# Altium PCB PCB1.PcbDoc
Units mil, origin at the board's own origin, x right, y up, seen from the top; angles counter-clockwise.
Board outline 6000 x 4000 mil, 2 copper layers (Top Layer, Bottom Layer); 9 components, 23 nets, 266 pads, 0 vias.
Unrouted connection lines stored in the file: 25.
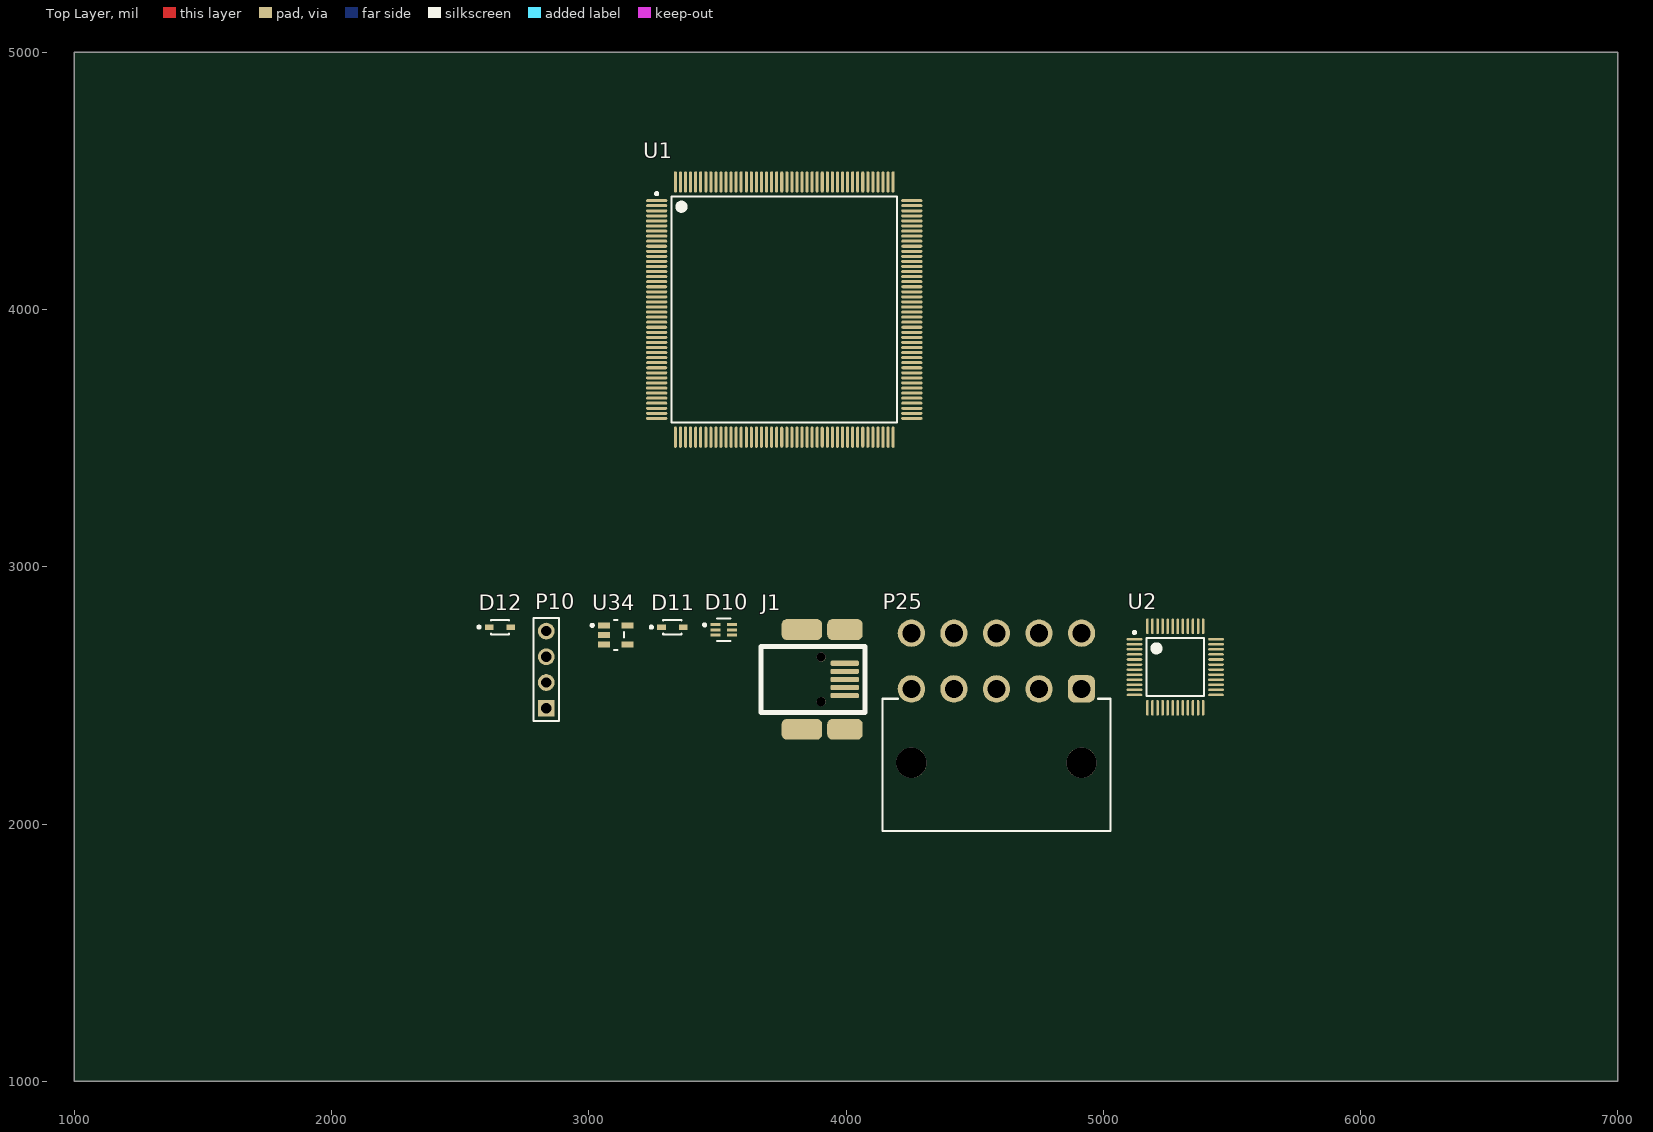
[diagram p0: Top Layer view]
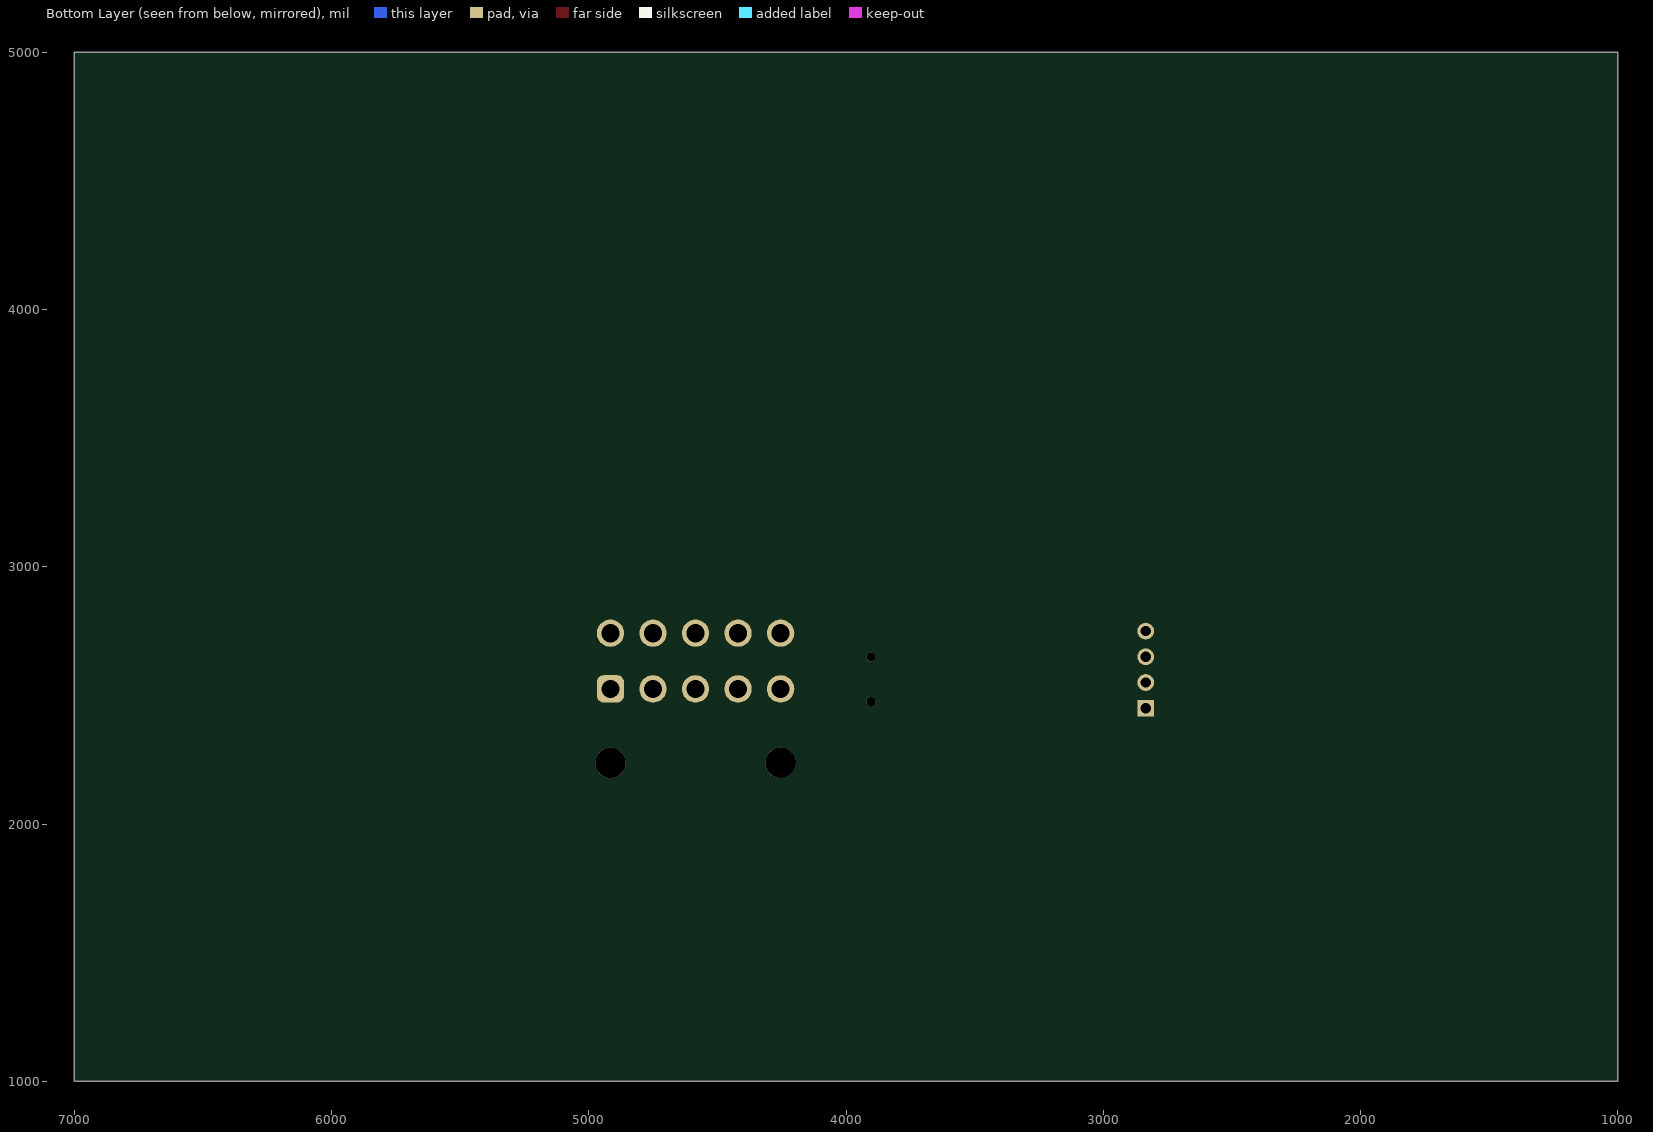
[diagram p1: Bottom Layer view, seen from below]

## Layer stack, top to bottom
Top Solder: solder mask 0.4, Solder Resist, Dk 3.5
Top Layer: signal copper 1.4
Dielectric 1: dielectric 12.6, FR-4, Dk 4.8
Bottom Layer: signal copper 1.4
Bottom Solder: solder mask 0.4, Solder Resist, Dk 3.5

## Board outline
1000,1000 7000,1000 7000,5000 1000,5000

## Design rules (kind name [scope] priority, off if disabled: settings)
Clearance [All] p1: gap=10 ignorepadtopadclearanceinfootprint=FALSE
DiffPairsRouting [All] p1: maxlimit=10 minlimit=10 mostfreqgap=10 toplayer_minwidth=15 toplayer_maxwidth=15 toplayer_prefwidth=15 bottomlayer_minwidth=15 bottomlayer_maxwidth=15 bottomlayer_prefwidth=15 maxuncoupledlength=500
PolygonConnect [All] p1: connectstyle=Relief reliefconductorwidth=10 reliefentries=4 polygonreliefangle="90 Angle" airgapwidth=10
RoutingVias [All] p1: holewidth=28 width=50 viastyle="Through Hole" minholewidth=28 minwidth=50 maxholewidth=28 maxwidth=50
SolderMaskExpansion [All] p1: expansion=4 istentingtop=FALSE
Width [All] p1: maxlimit=10 minlimit=10 preferedwidth=10
29 further rules are at their usual default settings.

## Classes and differential pairs
component class Sheet1: U1
differential pair CON_USB_STLK: +CON_USB_STLK_P -CON_USB_STLK_N

## Components (designator, comment, footprint, x,y, rotation, side; value= is the part's Value field where it differs from the comment)
D10 "USBLC6-2P6" FP-SOT-666-MFG 3525,2755 r0 top
D11 "BAT60JFILM" FP-BAT60JFILM-MFG 3325,2765 r0 top
D12 "BAT60JFILM" FP-BAT60JFILM-MFG 2655,2765 r0 top
J1 "67503-1020" MOLX-67503-1020_V 3995,2625 r0 top
P10 "Header 4" HDR1X4 2835,2450 r90 top
P25 "649010227222" 649010227222 4585,2230 r0 top
U1 "STM32F407IGT6" STM-LQFP176_M 3760,4000 r0 top
U2 "STM32F103C8T6" STM-LQFP48_L 5280,2610 r0 top
U34 "LD3985M33R" FP-SOT23-5L-7049676-MFG 3105,2735 r0 top

## Footprints (in the part's own frame and the unit in brackets; to place one, negate y for a bottom-side part, rotate by r counter-clockwise, add the part's x,y. Pads: shape width x height; smd on the part's side, far side on the other; paste and mask are expansions set on the pad)
649010227222 [mm] "4.20mm Male Dual Row Angled Header with Mounting Pegs, 10p"
  rrect50% 2.7x2.7 hole 1.8: 1(8.4,7.5)
  round 2.7 hole 1.8: 2(4.2,7.5) 3(0,7.5) 4(-4.2,7.5) 5(-8.4,7.5) 6(8.4,13) 7(4.2,13) 8(0,13) 9(-4.2,13) 10(-8.4,13)
  round 3 hole 3 unplated: MH1(-8.4,0.2) MH2(8.4,0.2)
  silkscreen extent -11.25,-6.53 11.25,6.53, body extent -11.1,-6.4 11.4,13.57, height 11.43
FP-BAT60JFILM-MFG [mm]
  rect 0.86x0.54 smd paste+0 mask+0: 1(-1.07,0) 2(1.07,0)
  silkscreen extent -2.2,-0.72 0.9,0.72, body extent -1.6,-0.82 1.6,0.82, height 0.25
FP-SOT23-5L-7049676-MFG [mm]
  rect 1.2x0.6 smd paste+0 mask+0: 1(-1.15,0.95) 2(-1.15,0) 3(-1.15,-0.95) 4(1.15,-0.95) 5(1.15,0.95)
  silkscreen extent -2.45,-1.48 0.8,1.47, body extent -1.85,-1.58 1.85,1.57, height 0.25
FP-SOT-666-MFG [mm]
  rect 0.99x0.3 smd paste+0 mask+0: 1(-0.805,0.5) 2(-0.805,0) 3(-0.805,-0.5) 4(0.805,-0.5) 5(0.805,0) 6(0.805,0.5)
  silkscreen extent -2.02,-1.1 0.65,1.1, body extent -1.4,-0.95 1.4,0.95, height 0.25
HDR1X4 [mil] "Connector; Header; 4 Position"
  rect 65x65 hole 40: 1(0,0)
  round 65 hole 40: 2(100,0) 3(200,0) 4(300,0)
  silkscreen extent -50,-50 350,50, body extent -47,-48 353,50, height 370
MOLX-67503-1020_V [mm] "Mini USB Connector, SMT, Righer Angle"
  rrect50% 2.8x0.5 smd: 1(0,0) 2(0,-0.8) 3(0,-1.6) 4(0,-2.4) 5(0,-3.2)
  rrect50% 3.5x2.05 smd: 6(0.025,3.325) 8(0.025,-6.525)
  rrect50% 4x2.05 smd: 7(-4.225,3.325) 9(-4.225,-6.525)
  round 0.9 hole 0.9 unplated: X(-2.325,-3.8) Y(-2.325,0.6)
  silkscreen extent -8.25,-4.85 2,1.65, body extent -8.22,-6.56 0.78,3.34, height 3.95
STM-LQFP48_L [mm] "QFP, 48-Leads, Body 7x7mm, Pitch 0.5mm, IPC High Density"
  oval 1.55x0.25 smd: 1(-4.025,2.75) 2(-4.025,2.25) 3(-4.025,1.75) 4(-4.025,1.25) 5(-4.025,0.75) 6(-4.025,0.25) 7(-4.025,-0.25) 8(-4.025,-0.75) 9(-4.025,-1.25) 10(-4.025,-1.75) 11(-4.025,-2.25) 12(-4.025,-2.75) 25(4.025,-2.75) 26(4.025,-2.25) 27(4.025,-1.75) 28(4.025,-1.25) 29(4.025,-0.75) 30(4.025,-0.25) 31(4.025,0.25) 32(4.025,0.75) 33(4.025,1.25) 34(4.025,1.75) 35(4.025,2.25) 36(4.025,2.75)
  oval 0.25x1.55 smd: 13(-2.75,-4.025) 14(-2.25,-4.025) 15(-1.75,-4.025) 16(-1.25,-4.025) 17(-0.75,-4.025) 18(-0.25,-4.025) 19(0.25,-4.025) 20(0.75,-4.025) 21(1.25,-4.025) 22(1.75,-4.025) 23(2.25,-4.025) 24(2.75,-4.025) 37(2.75,4.025) 38(2.25,4.025) 39(1.75,4.025) 40(1.25,4.025) 41(0.75,4.025) 42(0.25,4.025) 43(-0.25,4.025) 44(-0.75,4.025) 45(-1.25,4.025) 46(-1.75,4.025) 47(-2.25,4.025) 48(-2.75,4.025)
  silkscreen extent -4.15,-2.85 2.85,3.55, body extent -3.5,-3.5 3.5,3.5, height 1.6
STM-LQFP176_M [mm] "Thin QFP, 176-Leads, Body 24x24mm, Pitch 0.5mm, IPC Low Density"
  oval 2.1x0.3 smd: 1(-12.6,10.75) 2(-12.6,10.25) 3(-12.6,9.75) 4(-12.6,9.25) 5(-12.6,8.75) 6(-12.6,8.25) 7(-12.6,7.75) 8(-12.6,7.25) 9(-12.6,6.75) 10(-12.6,6.25) 11(-12.6,5.75) 12(-12.6,5.25) 13(-12.6,4.75) 14(-12.6,4.25) 15(-12.6,3.75) 16(-12.6,3.25) 17(-12.6,2.75) 18(-12.6,2.25) 19(-12.6,1.75) 20(-12.6,1.25) 21(-12.6,0.75) 22(-12.6,0.25) 23(-12.6,-0.25) 24(-12.6,-0.75) 25(-12.6,-1.25) 26(-12.6,-1.75) 27(-12.6,-2.25) 28(-12.6,-2.75) 29(-12.6,-3.25) 30(-12.6,-3.75) 31(-12.6,-4.25) 32(-12.6,-4.75) 33(-12.6,-5.25) 34(-12.6,-5.75) 35(-12.6,-6.25) 36(-12.6,-6.75) 37(-12.6,-7.25) 38(-12.6,-7.75) 39(-12.6,-8.25) 40(-12.6,-8.75) 41(-12.6,-9.25) 42(-12.6,-9.75) 43(-12.6,-10.25) 44(-12.6,-10.75) 89(12.6,-10.75) 90(12.6,-10.25) 91(12.6,-9.75) 92(12.6,-9.25) 93(12.6,-8.75) 94(12.6,-8.25) 95(12.6,-7.75) 96(12.6,-7.25) 97(12.6,-6.75) 98(12.6,-6.25) 99(12.6,-5.75) 100(12.6,-5.25) 101(12.6,-4.75) 102(12.6,-4.25) 103(12.6,-3.75) 104(12.6,-3.25) 105(12.6,-2.75) 106(12.6,-2.25) 107(12.6,-1.75) 108(12.6,-1.25) 109(12.6,-0.75) 110(12.6,-0.25) 111(12.6,0.25) 112(12.6,0.75) 113(12.6,1.25) 114(12.6,1.75) 115(12.6,2.25) 116(12.6,2.75) 117(12.6,3.25) 118(12.6,3.75) 119(12.6,4.25) 120(12.6,4.75) 121(12.6,5.25) 122(12.6,5.75) 123(12.6,6.25) 124(12.6,6.75) 125(12.6,7.25) 126(12.6,7.75) 127(12.6,8.25) 128(12.6,8.75) 129(12.6,9.25) 130(12.6,9.75) 131(12.6,10.25) 132(12.6,10.75)
  oval 0.3x2.1 smd: 45(-10.75,-12.6) 46(-10.25,-12.6) 47(-9.75,-12.6) 48(-9.25,-12.6) 49(-8.75,-12.6) 50(-8.25,-12.6) 51(-7.75,-12.6) 52(-7.25,-12.6) 53(-6.75,-12.6) 54(-6.25,-12.6) 55(-5.75,-12.6) 56(-5.25,-12.6) 57(-4.75,-12.6) 58(-4.25,-12.6) 59(-3.75,-12.6) 60(-3.25,-12.6) 61(-2.75,-12.6) 62(-2.25,-12.6) 63(-1.75,-12.6) 64(-1.25,-12.6) 65(-0.75,-12.6) 66(-0.25,-12.6) 67(0.25,-12.6) 68(0.75,-12.6) 69(1.25,-12.6) 70(1.75,-12.6) 71(2.25,-12.6) 72(2.75,-12.6) 73(3.25,-12.6) 74(3.75,-12.6) 75(4.25,-12.6) 76(4.75,-12.6) 77(5.25,-12.6) 78(5.75,-12.6) 79(6.25,-12.6) 80(6.75,-12.6) 81(7.25,-12.6) 82(7.75,-12.6) 83(8.25,-12.6) 84(8.75,-12.6) 85(9.25,-12.6) 86(9.75,-12.6) 87(10.25,-12.6) 88(10.75,-12.6) 133(10.75,12.6) 134(10.25,12.6) 135(9.75,12.6) 136(9.25,12.6) 137(8.75,12.6) 138(8.25,12.6) 139(7.75,12.6) 140(7.25,12.6) 141(6.75,12.6) 142(6.25,12.6) 143(5.75,12.6) 144(5.25,12.6) 145(4.75,12.6) 146(4.25,12.6) 147(3.75,12.6) 148(3.25,12.6) 149(2.75,12.6) 150(2.25,12.6) 151(1.75,12.6) 152(1.25,12.6) 153(0.75,12.6) 154(0.25,12.6) 155(-0.25,12.6) 156(-0.75,12.6) 157(-1.25,12.6) 158(-1.75,12.6) 159(-2.25,12.6) 160(-2.75,12.6) 161(-3.25,12.6) 162(-3.75,12.6) 163(-4.25,12.6) 164(-4.75,12.6) 165(-5.25,12.6) 166(-5.75,12.6) 167(-6.25,12.6) 168(-6.75,12.6) 169(-7.25,12.6) 170(-7.75,12.6) 171(-8.25,12.6) 172(-8.75,12.6) 173(-9.25,12.6) 174(-9.75,12.6) 175(-10.25,12.6) 176(-10.75,12.6)
  silkscreen extent -12.72,-11.15 11.15,11.57, body extent -12,-12 12,12, height 1.6

## Part data
D10: library part CMP-12225-000058-1, "TVS DIODE 5.25V 17V SOT666", Breakdown Voltage=6V, Capacitance=3.5pF, Case/Package=SOT-666, Clamping Voltage=17V, Leakage Current=150nA, Max Operating Temperature=125°C, Min Operating Temperature=-40°C, Operating Supply Voltage=5V, Package Quantity=1, Peak Pulse Current=5A, Power Line Protection=Yes, Test Current=1mA, Contact Plating=Tin, Depth=1.3mm, Direction=Unidirectional, Element Configuration=Dual, ESD Protection=Yes, Height=0.6mm, Lead Free="Lead Free", Length=1.7mm, Max Breakdown Voltage=6V, Max Reverse Leakage Current=150nA, Min Breakdown Voltage=6V, Mount="Surface Mount", Number of Bidirectional Channels=2, Number of Channels=2, Number of Elements=1, Number of Pins=6, Packaging="Tape and Reel", Polarity=Unidirectional, Radiation Hardening=No, REACH SVHC="No SVHC", Reverse Breakdown Voltage=6V, Reverse Standoff Voltage=5V, Termination=SMD/SMT, Width=1.3mm, Working Voltage=5V
D11 D12: library part CMP-12187-000028-1, "DIODE SCHOTTKY 10V 3A SOD323", Average Rectified Current=3A, Forward Voltage=580mV, Max Forward Surge Current (Ifsm)=5A, Max Operating Temperature=150°C, Max Repetitive Reverse Voltage (Vrrm)=10V, Max Reverse Leakage Current=7.5uA, Min Operating Temperature=-65°C, Package Quantity=1, Contact Plating=Tin, Current Rating=3A, Element Configuration=Single, Forward Current=3A, Height=1.07mm, Lead Free="Lead Free", Length=1.8mm, Max Reverse Voltage (DC)=10V, Max Surge Current=5A, Mount="Surface Mount", Number of Pins=2, Output Current=3A, Packaging="Tape and Reel", Peak Non-Repetitive Surge Current=5A, Peak Reverse Current=7.5uA, Polarity=Standard, Radiation Hardening=No, REACH SVHC="No SVHC", Voltage Rating (DC)=10V, Weight=0.01lb, Width=1.45mm
J1: library part MOLX-67503-1020, "USB, MINI, SMD, RA KME04-USBMU03A01", Manufacturer=Molex, ComponentLink1Description="Manufacturer URL", ComponentLink1URL=http://www.molex.com/, ComponentLink2Description=Datasheet, ComponentLink2URL=http://www.molex.com/pdm_docs/sd/675031020_sd.pdf, DatasheetVersion="Rev F, 06/2009", Mounting Technology="Surface Mount", PackageDescription="Mini USB Connector, SMT, Righer Angle", PackageReference=67503-1020, PartNumber=67503-1020, Terminal Pitch="0.8 mm"
P10: "Header, 4-Pin Male", MPN=PEC04SFAN, PN=S1212E-04-ND, URL=http://www.digikey.ca/product-detail/en/PEC04SFAN/S1212E-04-ND
P25: library part CMP-1502-00532-2, Color=White, Contact Resistance=10mΩ, Current Rating=7A, Flammability Rating="UL94 V-0", Insulation Resistance=1GΩ, Max Operating Temperature=105°C, Min Operating Temperature=-40°C, Operating Supply Voltage=600V, Connector Type="Male Pin, Socket", Contact Gender=Male, Contact Material=Copper, Contact Plating=Tin, Fastening Type=Ramp, Gender=Male, Height=12.8mm, Housing Material=Nylon, Insulation=Insulated, Lead Pitch=4.2mm, Length=22.2mm, Mount="Through Hole", NexarPartId=8917592, Number of Contacts=10, Number of Pins=10, Number of Positions=10, Number of Rows=2, Pitch=4.2mm, REACH SVHC=Unknown, RoHS=Compliant, Row Spacing=5.5118mm, Termination="Through Hole", Voltage Rating=600V, Width=22.3mm
U1: library part CMP-0243-00010-3, "ARM Cortex-M4 32-bit MCU+FPU, 210 DMIPS, 1024 kB Flash, 192 kB Internal RAM, 140 I/Os, 176-pin LQFP, -40 to 85 degC, Tray", I/Os (High Current)=140, Manufacturer=STMicroelectronics, Operating Frequency(F) (Processor speed) (MHz)=168, Supply Voltage(Vcc) max (V)=3.6, Supply Voltage(Vcc) min (V)=1.8, ComponentLink1Description="Manufacturer URL", ComponentLink1URL=http://www.st.com/web/en/home.html, ComponentLink2Description=Datasheet, ComponentLink2URL=http://www.st.com/st-web-ui/static/active/en/resource/technical/document/datasheet/DM00037051.pdf, ComponentLink3Description="Package Specification", ComponentLink3URL=http://www.st.com/st-web-ui/static/active/en/resource/technical/document/datasheet/DM00035129.pdf, Core="ARM Cortex-M4", D/A Converter=2x12-bit, DatasheetVersion="Rev. 4", FLASH Size (Prog) (kB)=1024, Internal RAM Size (kB)=192, Mounting Technology="Surface Mount", PackageDescription="176-Pin Low Profile Quad Flat Package, 24 x 24 mm Body, 0.5 mm Pitch", PackageReference=LQFP176, PackageVersion="Rev. 4, 06/2013", Packing=Tray, PartNumber=STM32F407IGT6
U2: library part CMP-0237-00215-3, "ARM Cortex-M3 32-bit MCU, 64 KB Flash, 20 KB Internal RAM, 37 I/Os, 48-pin LQFP, -40 to 85 degC, Tray", I/Os (High Current)=37, Operating Frequency(F) (Processor speed) (MHz)=72, Supply Voltage(Vcc) min (V)=2, A/D Converter="2x12-bit (10 Channel)", ComponentLink1Description="Manufacturer URL", ComponentLink1URL=http://www.st.com/web/en/home.html, ComponentLink2Description=Datasheet, ComponentLink2URL=http://www.st.com/st-web-ui/static/active/en/resource/technical/document/datasheet/CD00161566.pdf, ComponentLink3Description="Package Specification", ComponentLink3URL=http://www.st.com/st-web-ui/static/active/en/resource/technical/document/datasheet/DM00058181.pdf, Core="ARM Cortex-M3", DatasheetVersion="Rev. 16", FLASH Size (Prog) (kB)=64, Internal RAM Size (kB)=20, Mounting Technology="Surface Mount", PackageDescription="48-Pin Low Profile Quad Flat Package, 7 x 7 mm Body, 0.5 mm Pitch", PackageReference=LQFP48, PackageVersion="Rev. 6, 06/2013", Packing=Tray, PartNumber=STM32F103C8T6
U34: library part CMP-0244-00328-3, Case/Package=SOT-23, Dropout Voltage=60mV, Input Bias Current=85µA, Max Input Voltage=6V, Max Junction Temperature (Tj)=125°C, Max Output Current=150mA, Min Current Limit=300mA, Min Input Voltage=2.5V, Min Operating Temperature=-40°C, Min Output Voltage=3.3V, Output Voltage Accuracy=2%, Quiescent Current=150µA, Accuracy=2%, Height=1.3mm, Lead Free="Lead Free", Length=3mm, Lifecycle Status=Production, Max Operating Temperature=125°C, Max Supply Voltage=6V, Min Supply Voltage=2.5V, Mount="Surface Mount", NexarPartId=526998, Number of Channels=1, Number of Outputs=1, Number of Pins=5, Number of Regulators=1, Output Current=150mA, Output Type=Fixed, Output Voltage=3.3V, Packaging="Cut Tape (CT)", Polarity=Positive, Radiation Hardening=No, RoHS=Compliant, Schedule B="8542390000, 8542390000", Width=1.75mm

## Nets (pads, with @x,y where several pads share a name; then routed paths per layer and width w, separated by ;. In a path a pad name is that pad's centre, name@x,y a point inside that pad or via, vN(x,y) a via of type N, cw(c..) or ccw(c..) an arc to the next point about the centre after c; other vN are vias at no path point)
3V: D11.1 P10.1 P25.1
5V: D12.1
5V_USB_ST_LINK: D10.5 D12.2 J1.1
CON_USB_STLK_N: D10.1 J1.2
CON_USB_STLK_P: D10.3 J1.3
GND: J1.6 J1.7 J1.8 J1.9 P10.3 P25.4 P25.5 U34.2
LED_STLINK: U2.30
NetC185_1: U34.1 U34.3
NetC188_2: D11.2 U34.5
NetC189_2: U34.4
NetD10_2: D10.2 J1.5
NetJ1_4: J1.4
NetLD11_2: 
NetLD11_3: 
NetR178_2: U2.10
NetR303_1: 
STL_USB_DM: D10.6 U2.32
STL_USB_DP: D10.4 U2.33
STM_JTCK_SWCLK: P10.2 P25.6 U2.37
STM_JTDI: P25.9 U2.38
STM_JTDO: P25.8 U2.39
STM_JTMS_SWDIO: P10.4 P25.7 U2.34
STM_RST: P25.10 U2.7
pads on no net: J1.X J1.Y P25.2 P25.3 P25.MH1 P25.MH2 U1.1 U1.2 U1.3 U1.4 U1.5 U1.6 U1.7 U1.8 U1.9 U1.10 U1.11 U1.12 U1.13 U1.14 U1.15 U1.16 U1.17 U1.18 U1.19 U1.20 U1.21 U1.22 U1.23 U1.24 U1.25 U1.26 U1.27 U1.28 U1.29 U1.30 U1.31 U1.32 U1.33 U1.34 U1.35 U1.36 U1.37 U1.38 U1.39 U1.40 U1.41 U1.42 U1.43 U1.44 U1.45 U1.46 U1.47 U1.48 U1.49 U1.50 U1.51 U1.52 U1.53 U1.54 U1.55 U1.56 U1.57 U1.58 U1.59 U1.60 U1.61 U1.62 U1.63 U1.64 U1.65 U1.66 U1.67 U1.68 U1.69 U1.70 U1.71 U1.72 U1.73 U1.74 U1.75 U1.76 U1.77 U1.78 U1.79 U1.80 U1.81 U1.82 U1.83 U1.84 U1.85 U1.86 U1.87 U1.88 U1.89 U1.90 U1.91 U1.92 U1.93 U1.94 U1.95 U1.96 U1.97 U1.98 U1.99 U1.100 U1.101 U1.102 U1.103 U1.104 U1.105 U1.106 U1.107 U1.108 U1.109 U1.110 U1.111 U1.112 U1.113 U1.114 U1.115 U1.116 U1.117 U1.118 U1.119 U1.120 U1.121 U1.122 U1.123 U1.124 U1.125 U1.126 U1.127 U1.128 U1.129 U1.130 U1.131 U1.132 U1.133 U1.134 U1.135 U1.136 U1.137 U1.138 U1.139 U1.140 U1.141 U1.142 U1.143 U1.144 U1.145 U1.146 U1.147 U1.148 U1.149 U1.150 U1.151 U1.152 U1.153 U1.154 U1.155 U1.156 U1.157 U1.158 U1.159 U1.160 U1.161 U1.162 U1.163 U1.164 U1.165 U1.166 U1.167 U1.168 U1.169 U1.170 U1.171 U1.172 U1.173 U1.174 U1.175 U1.176 U2.1 U2.2 U2.3 U2.4 U2.5 U2.6 U2.8 U2.9 U2.11 U2.12 U2.13 U2.14 U2.15 U2.16 U2.17 U2.18 U2.19 U2.20 U2.21 U2.22 U2.23 U2.24 U2.25 U2.26 U2.27 U2.28 U2.29 U2.31 U2.35 U2.36 U2.40 U2.41 U2.42 U2.43 U2.44 U2.45 U2.46 U2.47 U2.48